# Altium PCB PCB1.PcbDoc
Units mil, origin at the board's own origin, x right, y up, seen from the top; angles counter-clockwise.
Board outline 2225.69 x 1419.2 mil, 2 copper layers (Top Layer, Bottom Layer); 7 components, 12 nets, 33 pads, 7 vias.
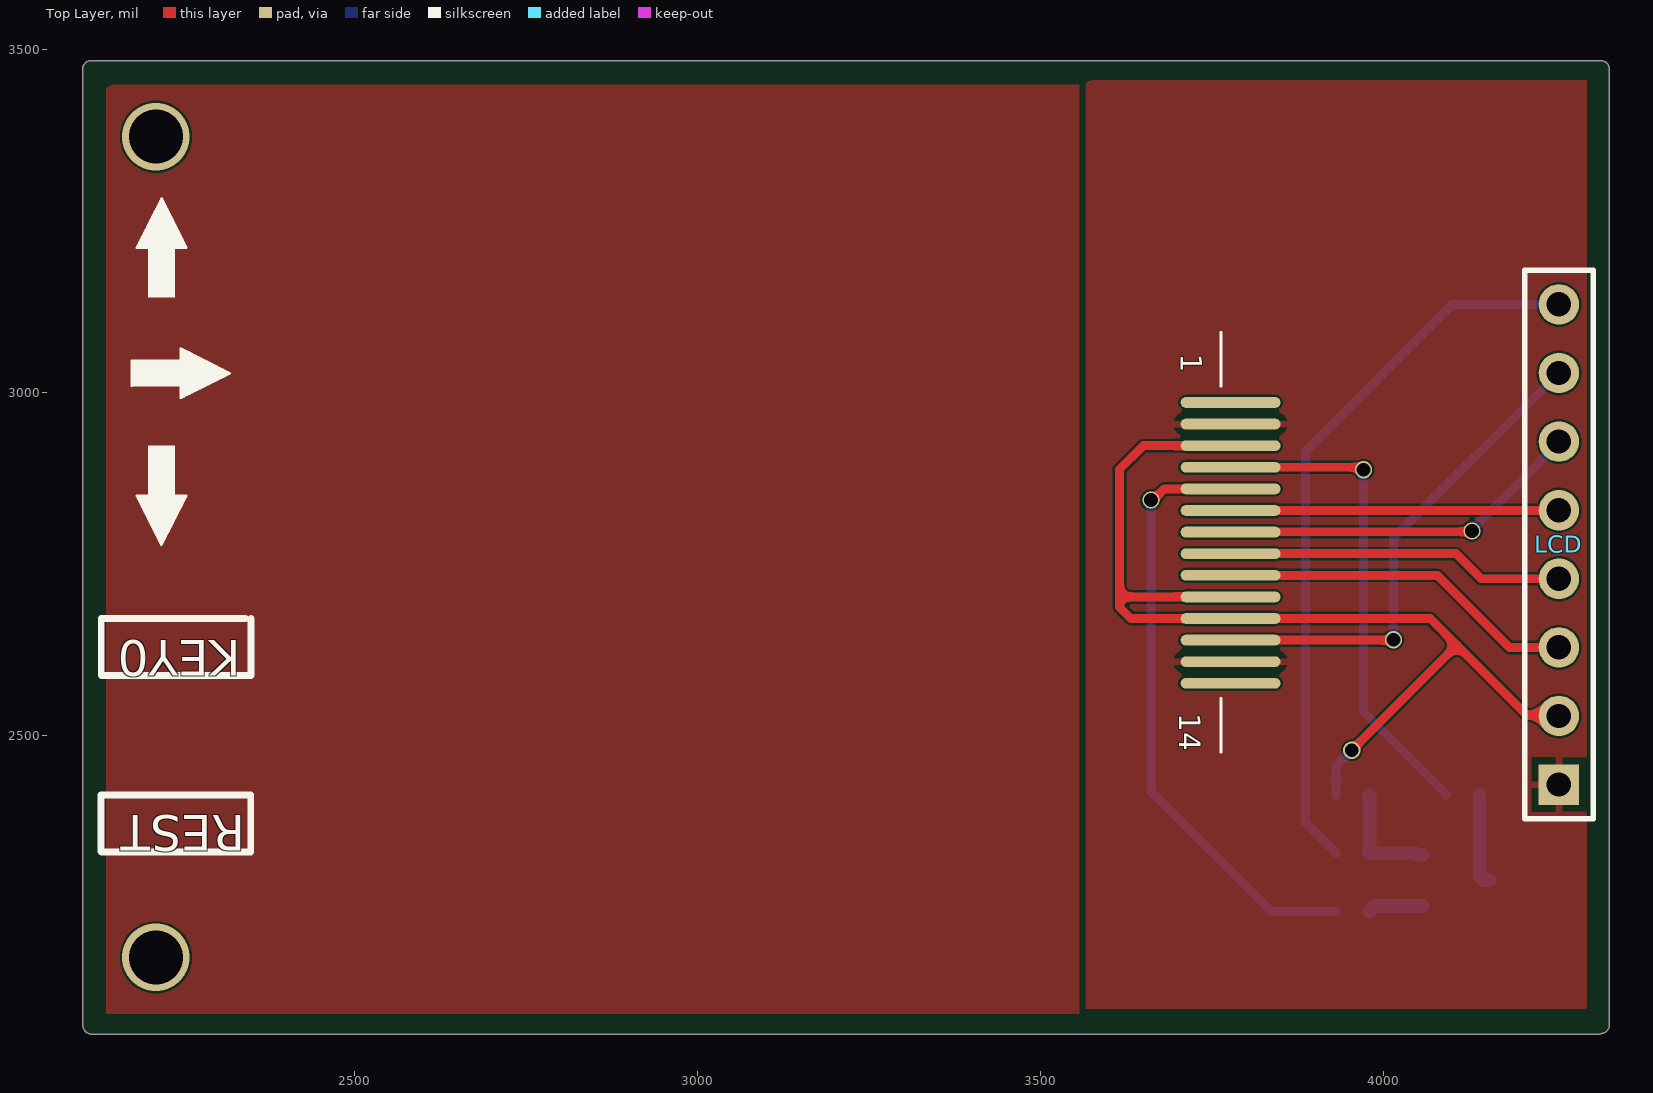
[diagram p0: Top Layer view]
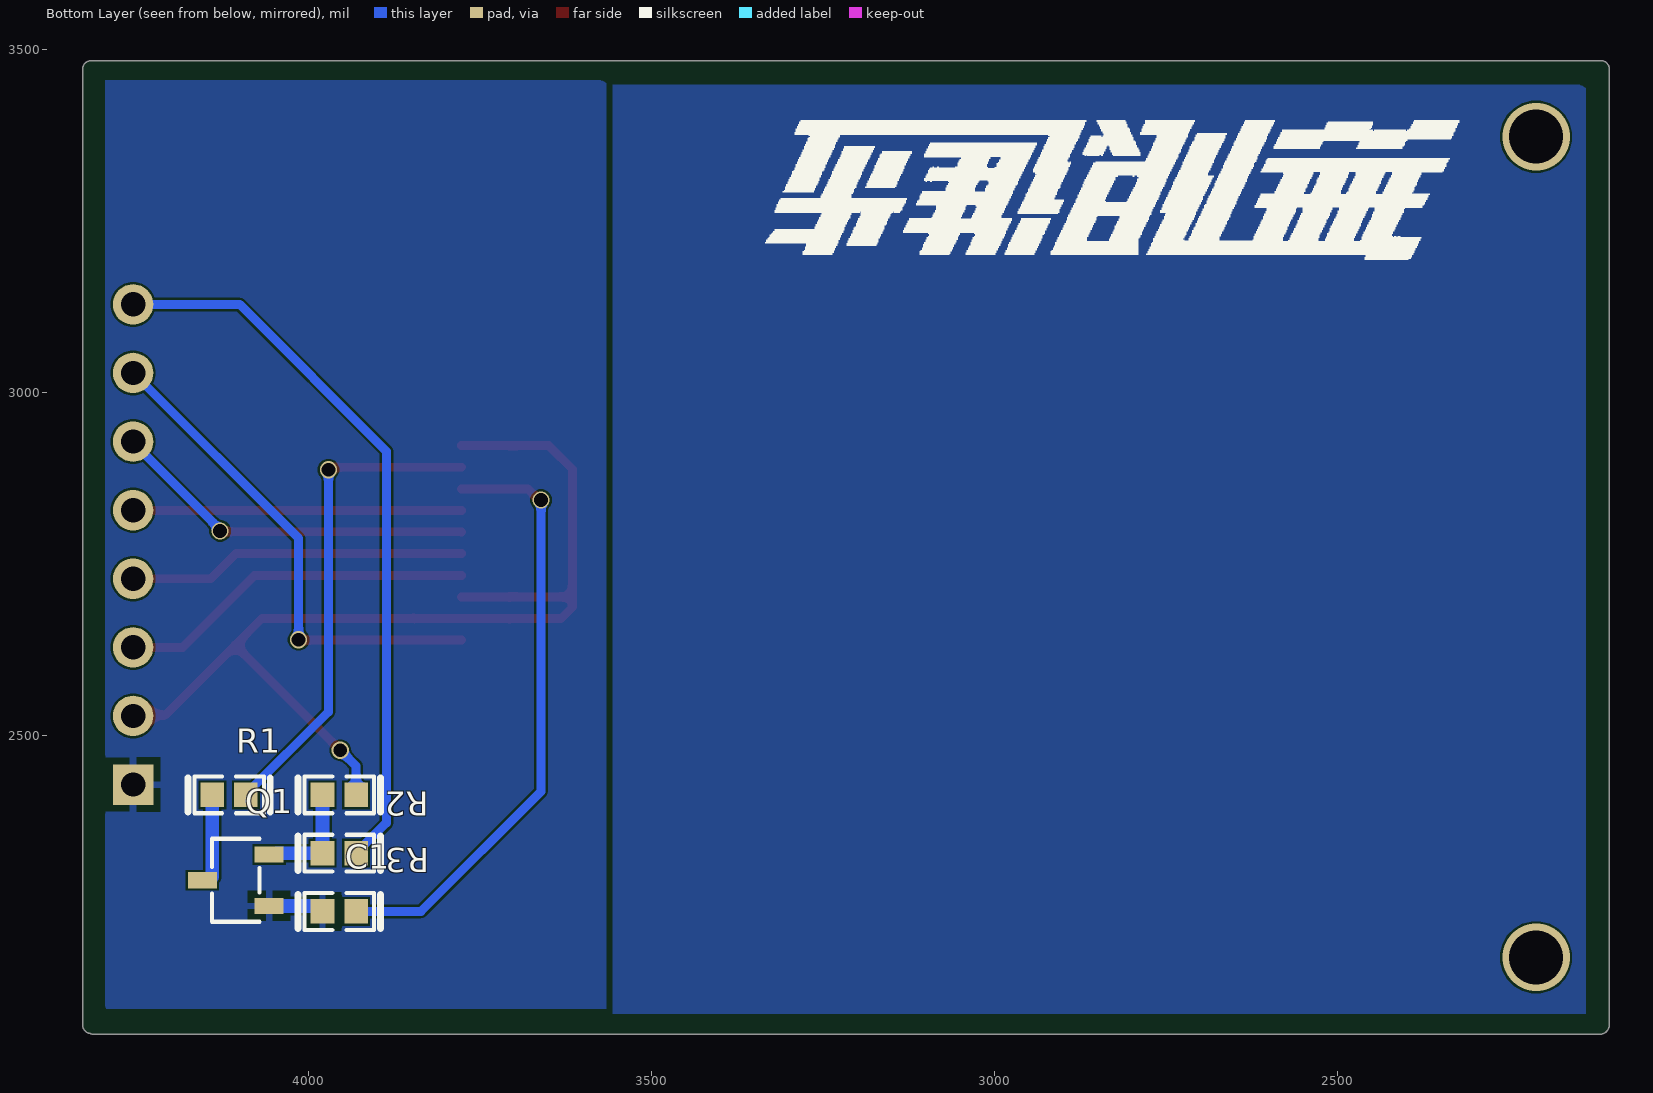
[diagram p1: Bottom Layer view, seen from below]

## Layer stack, top to bottom
Top Solder: solder mask 0.4, Solder Resist, Dk 3.5
Top Layer: signal copper 1.4
Dielectric 1: dielectric 12.6, FR-4, Dk 4.8
Bottom Layer: signal copper 1.4
Bottom Solder: solder mask 0.4, Solder Resist, Dk 3.5

## Board outline
4328.81,3471.07 ccw(c4316.29,3471.07) 4315.15,3483.53 ccw(c4314.93,3471.46) 4314.93,3483.53 2118.38,3483.53 ccw(c2118.38,3471.02) 2117.33,3483.49 ccw(c2115.63,3471.09) 2103.11,3471.09 2103.11,2077.9 ccw(c2115.63,2077.9) 2106.29,2069.57 ccw(c2116.42,2076.92) 2116.42,2064.4 4312.97,2064.4 ccw(c4312.97,2076.92) 4318.08,2065.49 ccw(c4316.29,2077.88) 4328.81,2077.88

## Design rules (kind name [scope] priority, off if disabled: settings)
Clearance [All] p1: gap=3 ignorepadtopadclearanceinfootprint=FALSE
DiffPairsRouting [All] p1: maxlimit=10 minlimit=0.1 mostfreqgap=10 toplayer_minwidth=0.15 toplayer_maxwidth=15 toplayer_prefwidth=15 bottomlayer_minwidth=0.15 bottomlayer_maxwidth=15 bottomlayer_prefwidth=15 maxuncoupledlength=500
HoleSize [All] p1: absolutevalues=TRUE maxlimit=100 minlimit=0.08 maxpercent=80.000 minpercent=20.000
HoleToHoleClearance [All] p1: gap=0.1 allowstackedmicrovias=TRUE
MinimumSolderMaskSliver [All] p1: minsoldermaskwidth=0.1
PolygonConnect [All] p1: connectstyle=Relief reliefconductorwidth=10 reliefentries=4 polygonreliefangle="90 Angle" airgapwidth=10
RoutingVias [All] p1: holewidth=28 width=50 viastyle="Through Hole" minholewidth=2.8 minwidth=1.06 maxholewidth=28 maxwidth=89.37
SilkToSilkClearance [All] p1: silktosilkclearance=0.1
SilkToSolderMaskClearance [IsPad] p1: minsilkscreentomaskgap=1 clearancetoexposedcopper=TRUE
SolderMaskExpansion [All] p1: expansion=4 istentingtop=FALSE
Width [All] p1: maxlimit=37.56 minlimit=0.21 preferedwidth=10
24 further rules are at their usual default settings.

## Classes and differential pairs
component class Sheet1: C1 Q1 R1 R2 R3

## Components (designator, comment, footprint, x,y, rotation, side; value= is the part's Value field where it differs from the comment)
C1 "0.1u" 0603 3949.69,2250.08 r0 bottom
LCD "Header 8" HDR1X8 4255.22,2428.22 r90 top
M1 "1.77_Z180SN009" "PCBComponent_1 - duplicate1" 3710.81,2790.53 r180 top
Q1 "8050" "PCBComponent_1 - duplicate" 4100.22,2298.22 r180 bottom
R1 "10" 0603 4120.22,2406.37 r180 bottom
R2 "10K" 0603 3949.69,2420.08 r0 bottom
R3 "1K" 0603 3959.69,2321.37 r180 bottom

## Footprints (in the part's own frame and the unit in brackets; to place one, negate y for a bottom-side part, rotate by r counter-clockwise, add the part's x,y. Pads: shape width x height; smd on the part's side, far side on the other; paste and mask are expansions set on the pad)
0603 [mil]
  rect 34.38x35.72 smd mask+2: 1(-19.47,6.86) 2(29.47,6.86)
  silkscreen extent -55,-20 65,34
HDR1X8 [mm] "Connector; Header; 8 Position"
  rect 1.5x1.5 hole 0.9: 1(0,0)
  round 1.5 hole 0.9: 2(2.54,0) 3(5.08,0) 4(7.62,0) 5(10.16,0) 6(12.7,0) 7(15.24,0) 8(17.78,0)
  silkscreen extent -1.27,-1.27 19.05,1.27
"PCBComponent_1 - duplicate" [mm]
  rect 1.07x0.6 smd mask+0.051: 1(1.1,-1.192) 2(1.1,0.708) 3(-1.37,-0.242)
  silkscreen extent -1.01,-1.78 0.74,1.29
"PCBComponent_1 - duplicate1" [mm]
  oval 3.7x0.4 smd: 1(-1.67,-4.946) 2(-1.67,-4.146) 3(-1.67,-3.346) 4(-1.67,-2.546) 5(-1.67,-1.746) 6(-1.67,-0.946) 7(-1.67,-0.146) 8(-1.67,0.654) 9(-1.67,1.454) 10(-1.67,2.254) 11(-1.67,3.054) 12(-1.67,3.854) 13(-1.67,4.654) 14(-1.67,5.454)
  silkscreen extent -1.32,-7.55 -1.32,8

## Part data
LCD: "Header, 8-Pin", LatestRevisionDate=17-Jul-2002, LatestRevisionNote="Re-released for DXP Platform.", Publisher="Altium Limited"
Q1: library part 2N3904, "NPN General Purpose Amplifier", ComponentLink1Description="Manufacturer Link", ComponentLink1URL=http://www.fairchildsemi.com/, ComponentLink2Description=Datasheet, ComponentLink2URL=http://www.fairchildsemi.com/ds/2N%2F2N3904.pdf, DatasheetVersion=1997, LatestRevisionDate=15-Jan-2003, LatestRevisionNote="PCB Footprint 'BCY-W3/D4.7' replaced", PackageDescription="TO, Flat Index; 3 In-Line, Axial Leads; Body Dia. 4.5mm; Leads 0.51 x 0.48 mm (max)", PackageReference=TO-92A, PackageVersion=Sep-1998, Published=8-Jun-2000, Publisher="Altium Limited"
R1: library part 180R, Contributor=LCEDA_Lib, nameAlias=Value(Ω), spicePre=R, spiceSymbolName=R_0603_EU
R2: library part 0R/10K, Contributor=LCEDA_Lib, nameAlias=Value(Ω), spicePre=R, spiceSymbolName=R_0603_EU
R3: library part 470R, Contributor=LCEDA_Lib, nameAlias=Value(Ω), spicePre=R, spiceSymbolName=R_0603_EU
C1: Contributor=LCEDA_Lib, nameAlias=Value(F), spicePre=C, spiceSymbolName=C_0402_US
M1: Contributor=私有工程, spicePre=M, spiceSymbolName=1.77_Z180SN009

## Via types
v1: diameter 25, hole 20, Top Layer to Bottom Layer, 5 vias
v2: diameter 98.43, hole 78.74, Top Layer to Bottom Layer, 2 vias

## Nets (pads, with @x,y where several pads share a name; then routed paths per layer and width w, separated by ;. In a path a pad name is that pad's centre, name@x,y a point inside that pad or via, vN(x,y) a via of type N, cw(c..) or ccw(c..) an arc to the next point about the centre after c; other vN are vias at no path point)
BLK: LCD.8 R3.2 | length 1062.6
  Bottom Layer w13: R3.2 3930.22,2328.89 3919.53,2339.58 3918.86,2339.58 3885.98,2372.47 3885.98,2914.19 4100.01,3128.22 LCD.8
CS: LCD.7 M1.12 | length 720.4
  Top Layer w13: M1.12 4006.76,2638.8 v1@4007.8,2639.84
  Bottom Layer w13: v1(4014.04,2639.42) 4014.04,2787.04 LCD.7
DC: LCD.6 M1.7 | length 535.4
  Top Layer w13: M1.7 3777.09,2796.8 4127.38,2796.8 v1(4128.49,2797.91)
  Bottom Layer w13: v1(4128.49,2797.91) 4128.49,2799.7 4255.22,2926.43 LCD.6
GND: C1.2 LCD.1 M1.2 M1.13 Q1.1 | length 81.5
  Bottom Layer w20: C1.2 3979.16,2243.89 3986.57,2251.3 Q1.1
NetC1_1: C1.1 M1.5 | length 889.6
  Top Layer w13: v1(3660.53,2842.93) 3663.78,2842.93 3680.12,2859.27 M1.5
  Bottom Layer w13: v1(3660.53,2842.93) 3660.53,2418.3 3835.61,2243.22 C1.1
NetM1_4: M1.4 R1.2 | length 719.1
  Top Layer w13: M1.4 3963.6,2890.76 3967.15,2887.21 v1(3970.39,2887.21)
  Bottom Layer w13: v1(3970.39,2887.21) 3970.39,2534.25 4090.75,2413.89 R1.2
NetQ1_2: Q1.2 R2.2 R3.1 | length 163.6
  Bottom Layer w20: R2.2 R3.1 4045.53,2328.22 4047.65,2326.1 Q1.2
NetQ1_3: Q1.3 R1.1 | length 135.9
  Bottom Layer w20: R1.1 4139.69,2293.92 4144.9,2288.7 Q1.3
RESET: LCD.5 M1.6 | length 478.8
  Top Layer w13: M1.6 3776.79,2828 4254.99,2828 LCD.5
SCK: LCD.3 M1.9 | length 522.2
  Top Layer w13: M1.9 4078.02,2733.28 4183.08,2628.22 LCD.3
SDA: LCD.4 M1.8 | length 493.8
  Top Layer w13: M1.8 4105.27,2764.78 4141.83,2728.22 LCD.4
VCC: LCD.2 M1.3 M1.10 M1.11 R2.1 | length 1536.4
  Top Layer w13: M1.10 3614.66,2701.79 ; M1.3 3649.3,2922.26 3614.66,2887.62 3614.66,2701.79 ; v1(3953.14,2478.17) 4106.43,2631.47 ; LCD.2 4253.85,2529.59 4208.31,2529.59 4106.43,2631.47 ; 3614.66,2701.79 3614.66,2686.85 3631.21,2670.29 M1.11 4067.6,2670.29 4106.43,2631.47
  Bottom Layer w13: R2.1 3930.22,2455.25 v1(3953.14,2478.17)
pads on no net: M1.1 M1.14
copper on no net:
  other v2: 2209.99,2176.32 2209.99,3372.66

## Polygon pours and split planes (outlines as drawn)
GND on Bottom Layer "GND_L02_P000" (solid, pour order 0): 3572.12,3453.65 3573.74,3455.27 4295.52,3455.27 4295.52,2101.62 4294.61,2100.7 4294.15,2101.16 3565.53,2101.16 3565.53,3455.42 3565.54,3455.44
no net on Bottom Layer "NONET_L02_P003" (solid, pour order 3): 2144.43,3446.82 2146.05,3448.44 3555.9,3448.44 3555.9,2094.34 3212.41,2100.85 3555.9,2094.34 2137.84,2094.34 2137.84,3448.6 2137.85,3448.61
GND on Top Layer "GND_L01_P001" (solid, pour order 1): 3572.12,3453.65 3573.74,3455.27 4295.52,3455.27 4295.52,2101.62 4294.61,2100.7 4294.15,2101.16 3565.53,2101.16 3565.53,3455.42 3565.54,3455.44
no net on Top Layer "NONET_L01_P002" (solid, pour order 2): 2144.43,3446.82 2146.05,3448.44 3555.9,3448.44 3555.9,2094.34 3212.41,2100.85 3555.9,2094.34 2137.84,2094.34 2137.84,3448.6 2137.85,3448.61

## Silkscreen, mask and mechanical layers (free items; w line width, h text height)
Top Overlay:
  drawing of 19 lines, arcs and shapes, not listed
  text "KEY0" at 2333.85,2655.1 h88.19 r180
  text "REST" at 2340.47,2400.3 h88.19 r180
Bottom Overlay:
  drawing of 9 lines, arcs and shapes, not listed
Mechanical 1:
  lines w25: 2115.63,2077.9 2115.63,3471.09 ; 2116.42,2076.92 2665.56,2076.92 3365.23,2076.92 3717.37,2076.92 4214.37,2076.92 4312.97,2076.92 ; 2118.38,3471.02 2646.75,3471.02 2818.01,3471.02 ; 3355.31,3471.02 2818.01,3471.02 ; 4314.93,3471.02 3413.97,3471.02 3245.63,3471.02 2818.01,3471.02 ; 4316.29,2077.88 4316.29,3471.07

## Text inside footprints (layer, text, board x,y; h text height)
M1: Top Overlay "14" at 3701.75,2532.5 h31.5 r270; Top Overlay "1" at 3703.74,3056.13 h31.5 r270